# Altium PCB ECEN4730_BRD2_2021-09-29.PcbDoc
Units mil, origin at the board's own origin, x right, y up, seen from the top; angles counter-clockwise.
Board outline 3500 x 2000 mil, 2 copper layers (Top Layer, Bottom Layer), stack 61.756 mil thick; 41 components, 28 nets, 133 pads, 13 vias.
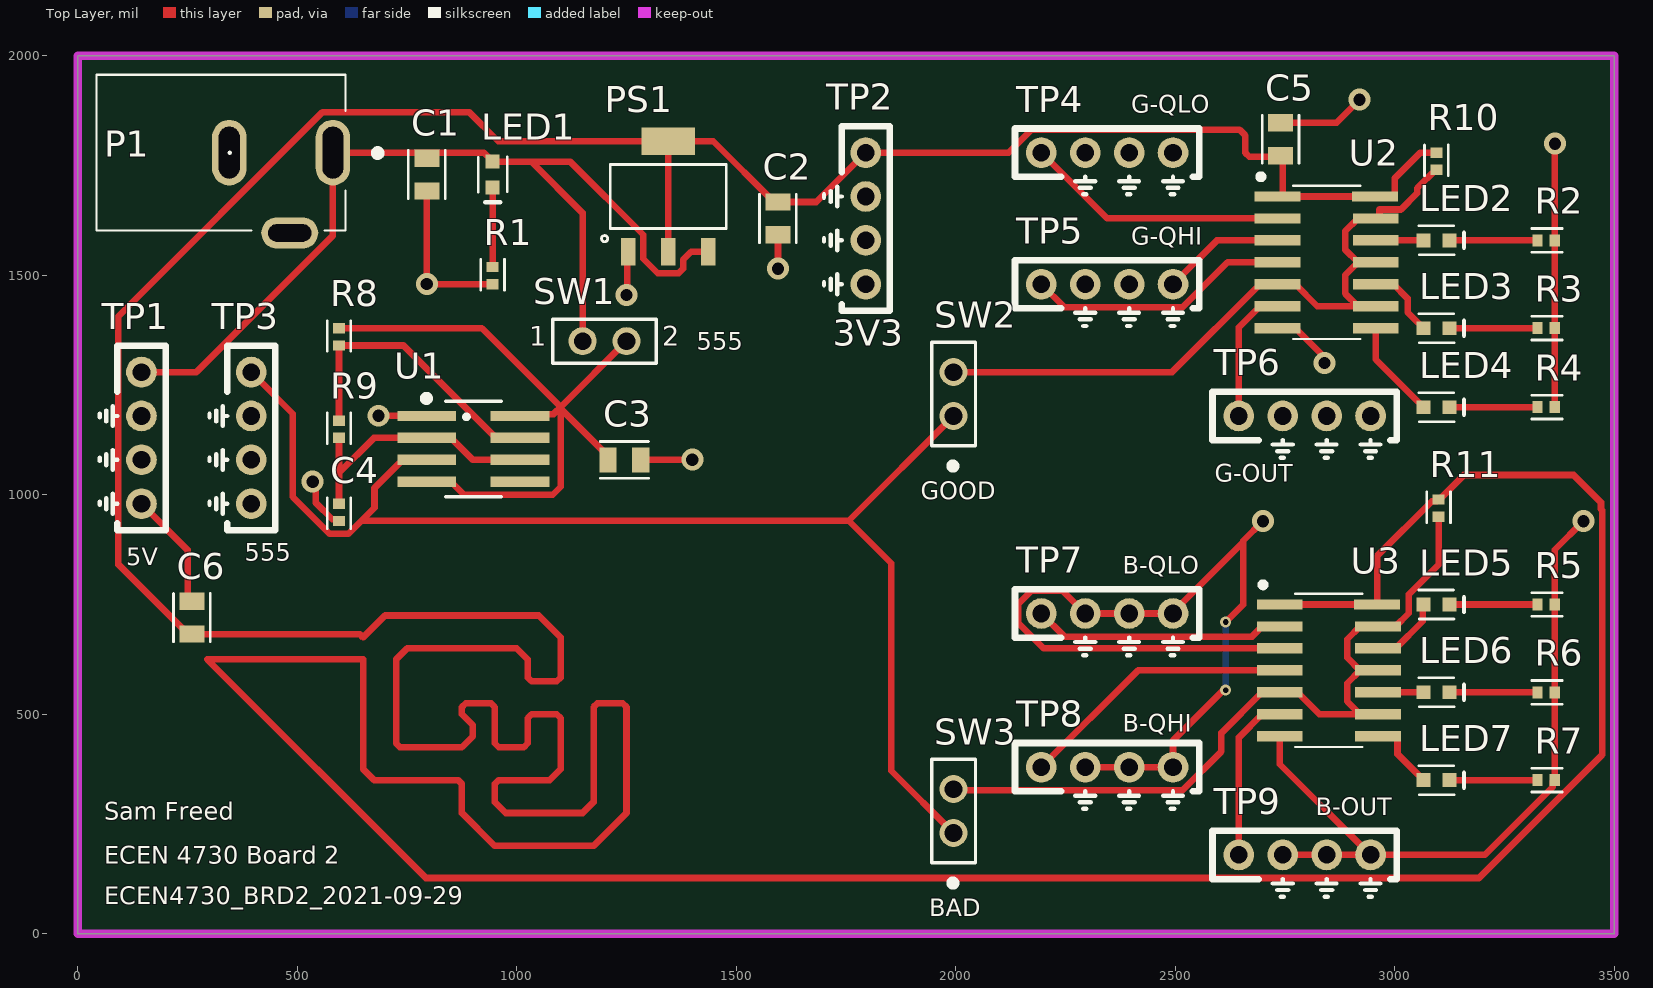
[diagram p0: Top Layer view]
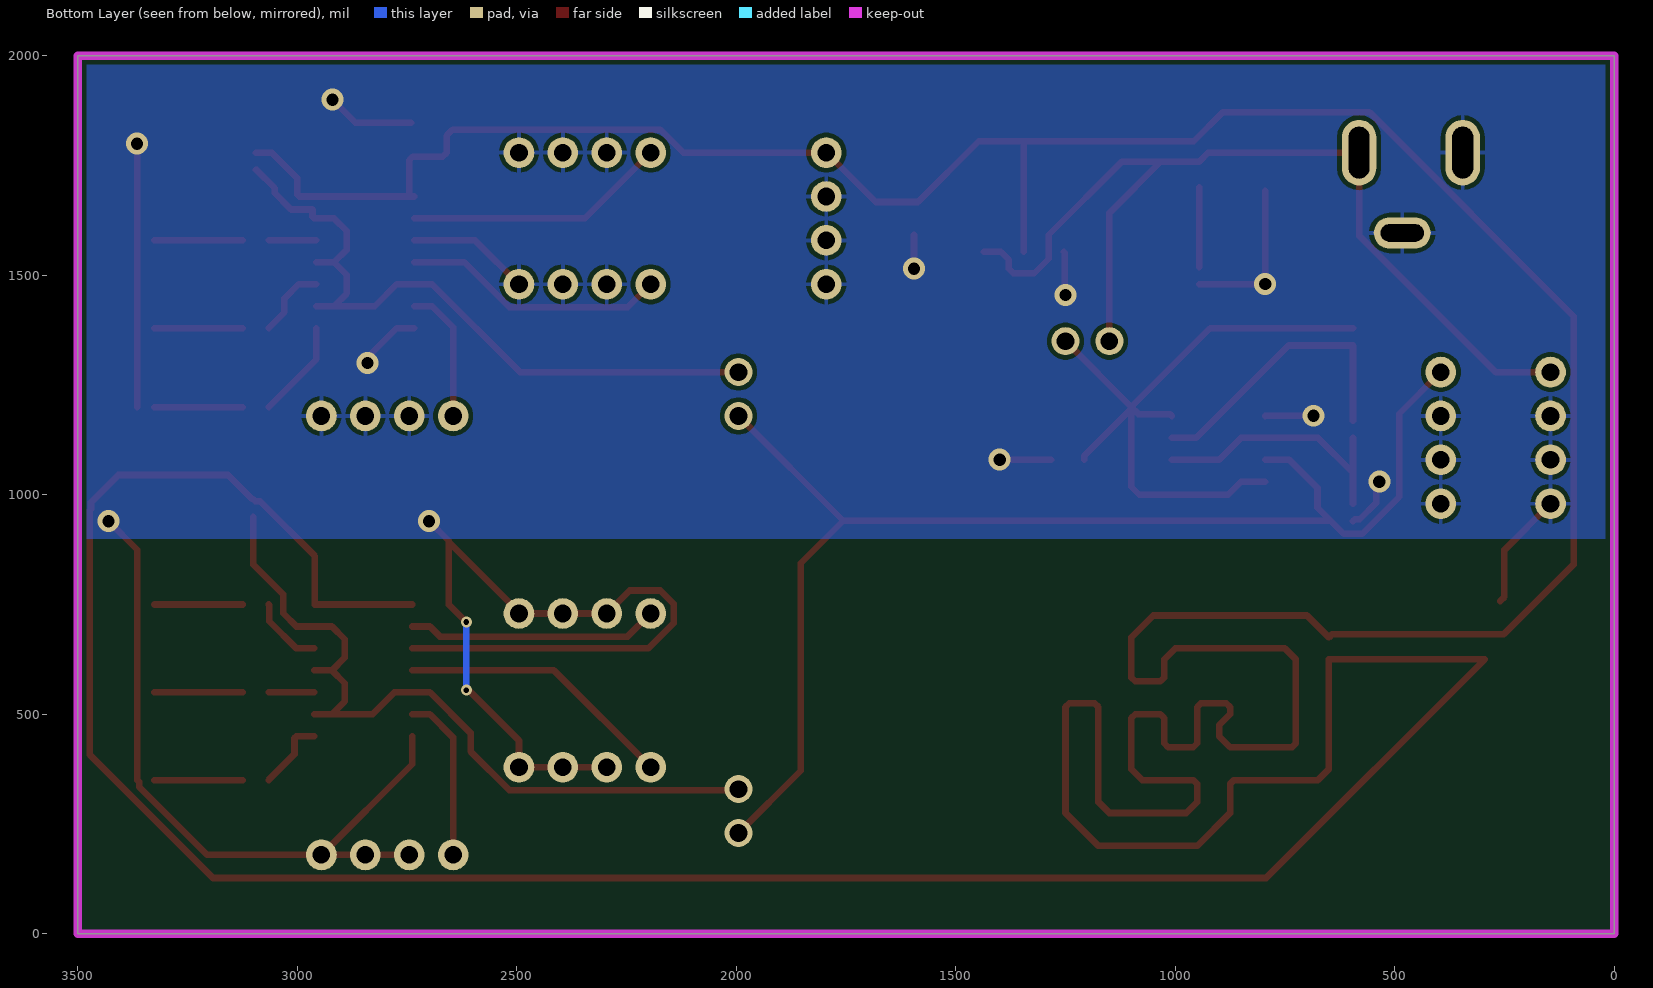
[diagram p1: Bottom Layer view, seen from below]
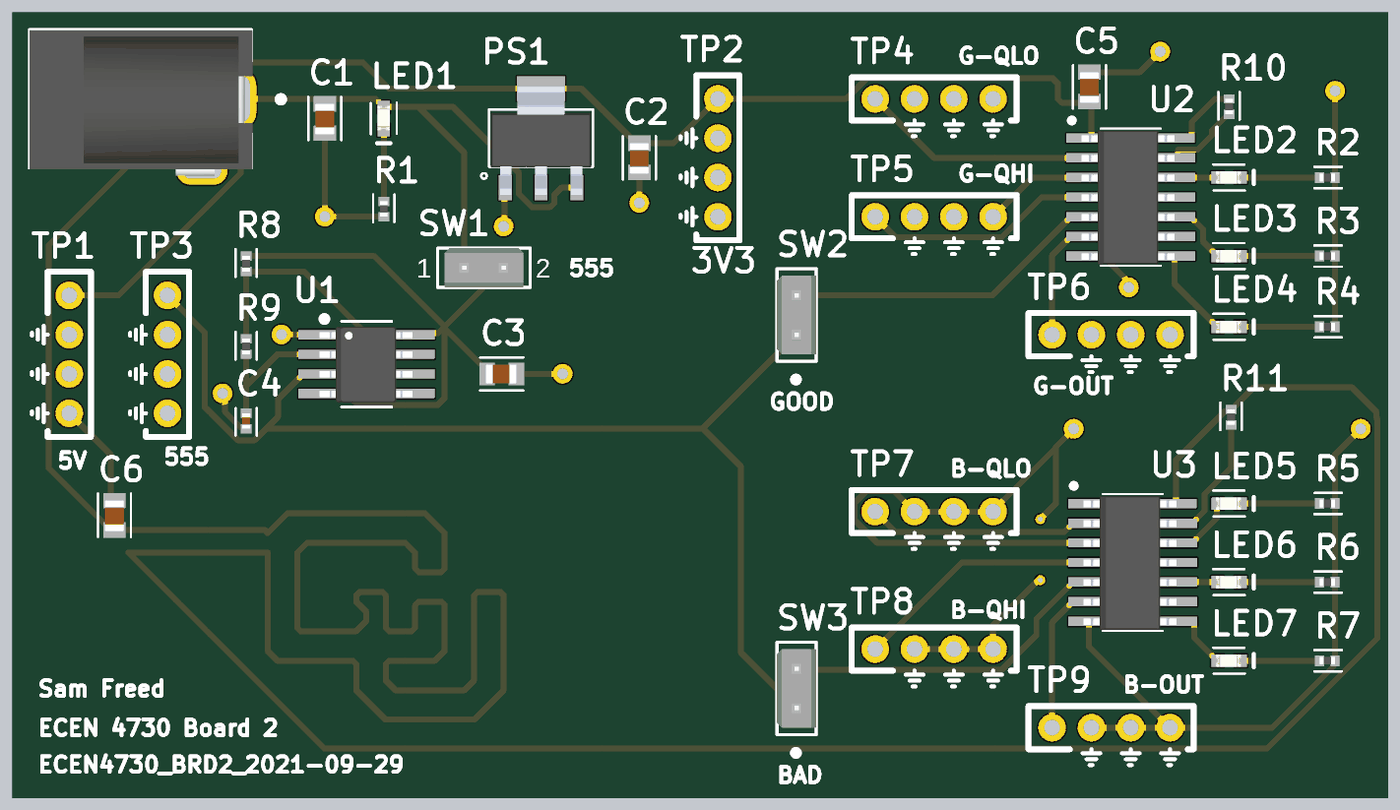
[diagram p2: 3D render of the assembled board from above, using the file's embedded part models]

## Layer stack, top to bottom
Top Solder: solder mask 1, SM-001, Dk 4
Top Layer: signal copper 1.378
Dielectric 1: core 59, Core-043, Dk 4.3
Bottom Layer: signal copper 1.378
Bottom Solder: solder mask 1, SM-001, Dk 4

## Board outline
0,0 3500,0 3500,2000 0,2000

## Design rules (kind name [scope] priority, off if disabled: settings)
BoardOutlineClearance [All] p1: gap=10 ignorepadtopadclearanceinfootprint=FALSE except(0: Arc-SplitContinuation Track-SplitContinuation SMDPad-SplitContinuation THPad-SplitContinuation Via-SplitContinuation Fill-SplitContinuation Poly-SplitContinuation Region-SplitContinuation Text-SplitContinuation)
Clearance [All] p1: gap=10 ignorepadtopadclearanceinfootprint=FALSE except(0: Arc-Hole Track-Hole SMDPad-Hole THPad-Hole Via-Hole Fill-Hole Poly-Hole Region-Hole Text-Hole)
PlaneClearance [All] p1: clearance=10
PlaneConnect [All] p1: planeconnectstyle=Direct reliefexpansion=20 reliefentries=4 reliefconductorwidth=10 reliefairgap=10
PolygonConnect [All] p1: thpad.connectstyle=Relief thpad.reliefconductorwidth=10 thpad.reliefentries=4 thpad.polygonreliefangle="90 Angle" thpad.airgapwidth=10 smdpad.connectstyle=Direct smdpad.reliefconductorwidth=10 smdpad.reliefentries=4 smdpad.polygonreliefangle="90 Angle" smdpad.airgapwidth=10 via.connectstyle=Direct via.reliefconductorwidth=10 via.reliefentries=4 via.polygonreliefangle="90 Angle" via.airgapwidth=10
RoutingVias [All] p1: holewidth=13 width=25 viastyle="Through Hole" minholewidth=13 minwidth=25 maxholewidth=60 maxwidth=80
SolderMaskExpansion [All] p1: expansion=4 istentingtop=FALSE
UnRoutedNet [All] p1: checkbadconnections=TRUE
Width "Schematic Width Constraint_2" [InNet('VCC')] p1: maxlimit=100 minlimit=10 preferedwidth=20 minimp=50.000000 maximp=50.000000 favimp=50.000000
Width "Schematic Width Constraint_1" [InNet('555_5V')] p2: maxlimit=100 minlimit=10 preferedwidth=20 minimp=50.000000 maximp=50.000000 favimp=50.000000
Width "Schematic Width Constraint" [InNet('+5')] p3: maxlimit=100 minlimit=10 preferedwidth=20 minimp=50.000000 maximp=50.000000 favimp=50.000000
Width [All] p4: maxlimit=100 minlimit=6 preferedwidth=6 minimp=50.000000 maximp=50.000000 favimp=50.000000
27 further rules are at their usual default settings.

## Components (designator, comment, footprint, x,y, rotation, side; value= is the part's Value field where it differs from the comment)
C1 "22uF" 0805_Passive_Capaciitor 795,1729.53 r90 top
C2 "22uF" 0805_Passive_Capaciitor 1595,1629.53 r90 top
C3 "22uF" 0805_Passive_Capaciitor 1245,1079.53 r0 top
C4 "1uF" 0402_Passive_Capacitor 595,959.84 r270 top
C5 "22uF" 0805_Passive_Capaciitor 2740,1810 r90 top
C6 "22uF" 0805_Passive_Capaciitor 260,720 r90 top
LED1 "KT-0603R" LED_0603 945,1729.53 r270 top value=Red
LED2 "KT-0603R" LED_0603 3095,1579.53 r0 top value=Red
LED3 "KT-0603R" LED_0603 3095,1379.53 r0 top value=Red
LED4 "KT-0603R" LED_0603 3095,1199.53 r0 top value=Red
LED5 "KT-0603R" LED_0603 3095,750 r0 top value=Red
LED6 "KT-0603R" LED_0603 3095,550 r0 top value=Red
LED7 "KT-0603R" LED_0603 3095,350 r0 top value=Red
P1 "Power Jack" Power_Jack 581.22,1779.53 r180 top value="CONN PWR JACK 2X5.5MM SOLDER"
PS1 "AMS1117-3.3" LDO 1345,1679.53 r0 top value="IC REG LINEAR 3.3V 800MA SOT223"
R1 "1k" 0402_Passive_Resistor 945,1499.21 r90 top value="1K Ohm"
R2 "47 Ohms" 0402_Passive_Resistor 3345,1579.53 r0 top value=47Ohm
R3 "47 Ohms" 0402_Passive_Resistor 3345,1379.53 r0 top value=47Ohm
R4 "47 Ohms" 0402_Passive_Resistor 3345,1199.53 r0 top value=47Ohm
R5 "47 Ohms" 0402_Passive_Resistor 3345,750 r0 top value=47Ohm
R6 "47 Ohms" 0402_Passive_Resistor 3345,550 r0 top value=47Ohm
R7 "47 Ohms" 0402_Passive_Resistor 3345,350 r0 top value=47Ohm
R8 "1k" 0402_Passive_Resistor 595,1359.84 r90 top value="1K Ohm"
R9 "1k" 0402_Passive_Resistor 595,1149.21 r90 top value="1K Ohm"
R10 "10k" 0402_Passive_Resistor 3095,1759.84 r90 top value=10KOhm
R11 "10k" 0402_Passive_Resistor 3100,969.68 r90 top value=10KOhm
SW1 "SW_555OffOn" 2Pin-Header-Conn 1150,1350 r0 top
SW2 "G-Switch" 2Pin-Header-Conn 1995,1179.53 r90 top
SW3 "B-Switch" 2Pin-Header-Conn 1995,229.53 r90 top
TP1 "TP_5V" TP10x_Probe 145,1129.53 r270 top
TP2 "TP 3V3" TP10x_Probe 1795,1629.53 r270 top
TP3 "TP_555_Out" TP10x_Probe 395,1129.53 r270 top
TP4 "G-Lo" TP10x_Probe 2345,1779.53 r0 top
TP5 "G-Hi" TP10x_Probe 2345,1479.53 r0 top
TP6 "G-Out" TP10x_Probe 2795,1179.53 r0 top
TP7 "B-Lo" TP10x_Probe 2345,729.53 r0 top
TP8 "B-Hi" TP10x_Probe 2345,379.53 r0 top
TP9 "B-Out" TP10x_Probe 2795,179.53 r0 top
U1 "NE555DR" TS555IDTTR 901.3,1104.53 r0 top
U2 "74HC14D,653" HEX_74AC14 2845,1529.53 r0 top
U3 "74HC14D,653" HEX_74AC14 2850,600 r0 top

## Footprints (in the part's own frame and the unit in brackets; to place one, negate y for a bottom-side part, rotate by r counter-clockwise, add the part's x,y. Pads: shape width x height; smd on the part's side, far side on the other; paste and mask are expansions set on the pad)
2Pin-Header-Conn [mm]
  round 1.62 hole 1.02: 1(0,0) 2(2.54,0)
  silkscreen extent -1.72,-1.27 4.26,1.26, body extent -1.27,-1.27 3.81,1.27, height 8.13
0402_Passive_Capacitor [mm] "Reference: https://www.worthingtonassembly.com/perfect-0402-footprint"
  rect 0.6x0.7 smd mask+0: 1(-0.5,0) 2(0.5,0)
  silkscreen extent -0.84,-0.69 0.94,0.69, body extent -0.5,-0.27 0.5,0.28, height 0.5
0402_Passive_Resistor [mm] "Reference: https://www.worthingtonassembly.com/perfect-0402-footprint"
  rect 0.6x0.7 smd mask+0: 1(-0.5,0) 2(0.5,0)
  silkscreen extent -0.84,-0.69 0.94,0.69, body extent -0.49,-0.25 0.51,0.25, height 0.4
0805_Passive_Capaciitor [mm] "Reference: http://livepartlibrary.com/fpdimensions.html"
  rect 1x1.45 smd mask+0: 1(-0.95,0) 2(0.95,0)
  silkscreen extent -1.4,-1.07 1.4,1.07, body extent -1.04,-0.62 0.96,0.63, height 1.4
HEX_74AC14 [mm]
  rect 2.65x0.6 smd: 1(-2.836,3.81) 2(-2.836,2.54) 3(-2.836,1.27) 4(-2.836,0) 5(-2.836,-1.27) 6(-2.836,-2.54) 7(-2.836,-3.81) 8(2.836,-3.81) 9(2.836,-2.54) 10(2.836,-1.27) 11(2.836,0) 12(2.836,1.27) 13(2.836,2.54) 14(2.794,3.81)
  silkscreen extent -3.94,-4.43 1.95,5.08, body extent -3.18,-4.35 2.82,4.3, height 1.75
LDO [mil]
  rect 33x63 smd: 1(-91,-126) 2(0,-126) 3(91,-126)
  rect 122x63 smd: 4(0,126)
  silkscreen extent -152,-103 132,73, body extent -128,-144 128,132, height 73
LED_0603 [mm]
  rect 0.8x0.8 smd: 1(-0.75,0) 2(0.75,0)
  silkscreen extent -1.02,-0.84 1.6,0.84, body extent -0.84,-0.41 0.76,0.39, height 0.55
Power_Jack [mm]
  oval 2x3.8 hole 1.2 slot 3 at 90 deg: 1(0,0) 2(6,0)
  oval 3.3x1.8 hole 1 slot 2.5 at 0 deg: 3(2.5,4.65)
  silkscreen extent -2.79,-4.5 13.68,4.5, body extent -0.76,-4.45 13.64,4.95, height 11.49
TP10x_Probe [mil] "Small Probs footprint"
  round 70 hole 40: 1(-150,0) 2(-50,0) 2(50,0) 2(150,0)
  silkscreen extent -210,-95 210,55
TS555IDTTR [mm] "IC OSC Single Timer 2.7MHz 8SOIC"
  rect 3.4x0.6 smd: 1(-2.7,1.905) 2(-2.7,0.635) 3(-2.7,-0.635) 4(-2.7,-1.905) 5(2.7,-1.905) 6(2.7,-0.635) 7(2.7,0.635) 8(2.7,1.905)
  silkscreen extent -2.85,-2.77 1.6,3.05, body extent -3.03,-2.48 2.96,2.43, height 1.75

## Part data
C1 C2 C3 C5 C6: library part C_22uF_0805, "MULTILAYER CERAMIC CAPACITORS MLCC - SMD/SMT 22UF 25V 0805 ROHS", LCSC Part#=C45783, MFR Part #=CL21A226MAQNNNE, Datasheet=https://datasheet.lcsc.com/szlcsc/Samsung-Electro-Mechanics-CL21A226MAQNNNE_C45783.pdf, Type=Basic
C4: library part C_1uF_0402, "MULTILAYER CERAMIC CAPACITORS MLCC - SMD/SMT 1UF 25V 0402 ROHS", LCSC Part#=C52923, MFR Part #=CL05A105KA5NQNC, Datasheet=https://datasheet.lcsc.com/szlcsc/Samsung-Electro-Mechanics-CL05A105KA5NQNC_C52923.pdf, Type=Basic
LED1 LED2 LED3 LED4 LED5 LED6 LED7: library part LED_RED_0603, "LIGHT EMITTING DIODES (LED) RED 520~625NM 90~100MCD@20MA TOP VIEW 0603 ROHS", LCSC Part#=C2286, Datasheet=https://datasheet.lcsc.com/szlcsc/Everlight-Elec-19-217-BHC-ZL1M2RY-3T_C72041.pdf, MFR Part #=KT-0603R, Type=Basic
P1: library part "P_Power Jack", "Power Barrel Connector Jack 2.10mm ID (0.083\"), 5.50mm OD (0.217\") Through Hole, Right Angle", LCSC Part#=C136744, Digikey Link=https://www.digikey.com/product-detail/en/PJ-102A/CP-102A-ND/275425/?itemSeq=304982367, Digikey Part=CP-102A-ND, Type=Extended
PS1: library part PS_AMS_LDO_3v3, "LOW DROPOUT REGULATORS(LDO) POSITIVE FIXED 1.3V @ 800MA 15V 3.3V 1A SOT-223 ROHS", LCSC Part#=C6186, MFR Part #=AMS1117-3.3, Type=Basic
R1 R8 R9: library part R_1K_0402, "1 kOhms chip resistor SURFACE MOUNT 1KOHMS ±1% 1/16W 0402 ROHS", LCSC Part#=C11702, MFR Part #=0402WGF1001TCE, Datasheet=https://datasheet.lcsc.com/szlcsc/Uniroyal-Elec-0402WGF1001TCE_C11702.pdf, Type=Basic
R2 R3 R4 R5 R6 R7: library part R_47Ohm_0402, "CHIP RESISTOR - SURFACE MOUNT 47OHMS ±1% 1/16W 0402 ROHS", LCSC Part#=C25118, MFR Part #=0402WGF470JTCE, Datasheet=https://datasheet.lcsc.com/szlcsc/Uniroyal-Elec-0402WGF470JTCE_C25118.pdf, Type=Basic
R10 R11: library part R_10KOhm_0402, "CHIP RESISTOR - SURFACE MOUNT 10KOHMS ±1% 1/16W 0402 ROHS", LCSC Part#=C25744, MFR Part #=0402WGF1002TCE, Datasheet=https://datasheet.lcsc.com/szlcsc/Uniroyal-Elec-0402WGF1002TCE_C25744.pdf, Type=Basic
SW1 SW2 SW3: library part SW_2Pin_100mil_Switch, "2Pin Header", LCSC Part#=C124375, Type=Extended
TP1 TP2 TP3 TP4 TP5 TP6 TP7 TP8 TP9: library part TP_10x_Probe, "Test Point 300 mil centers"
U1: library part U_555_Slow, "555 Timer SOIC-8_150MIL ROHS 150ns Rise Time", LCSC Part#=C7593, Digikey Link=https://www.digikey.com/product-detail/en/texas-instruments/NE555DR/296-6501-1-ND/372490, MFR Part #=NE555DR, Type=Basic
U2 U3: library part U_7414_HC_Hex, "Inverter IC 6 Channel Schmitt Trigger 14-SOIC", LCSC Part#=C5605, Datasheet=https://datasheet.lcsc.com/szlcsc/ON-Semicon-ON-74AC14SCX_C5482.pdf, MFR Part #=74HC14D,653, Type=Basic

## Via types
v1: diameter 50, hole 28, Top Layer to Bottom Layer, 11 vias
v2: diameter 25, hole 13, Top Layer to Bottom Layer, 2 vias

## Nets (pads, with @x,y where several pads share a name; then routed paths per layer and width w, separated by ;. In a path a pad name is that pad's centre, name@x,y a point inside that pad or via, vN(x,y) a via of type N, cw(c..) or ccw(c..) an arc to the next point about the centre after c; other vN are vias at no path point)
555_5V: C3.1 R8.2 SW1.2 U1.4 U1.8 | length 1554.6
  Top Layer w15: R8.2 920.47,1379.53 1100,1200 ; U1.4 850.12,1029.53 879.43,1000.22 1081.78,1000.22 1100,1018.44 1100,1191.92 ; U1.8 1011.91,1183.84 1083.84,1183.84 1091.92,1191.92 1100,1191.92 ; C3.1 1207.6,1088.39 1104.06,1191.92 1100,1191.92 ; SW1.2 1100,1200 ; 1100,1191.92 1100,1200
555_Out: SW2.1 SW3.1 TP3.1 U1.3 | length 3018.1
  Top Layer w15: TP3.1 489.75,1184.78 489.75,995.07 573.97,910.85 616.03,910.85 645.91,940.73 ; U1.3 739.88,1079.53 675.8,1015.45 675.8,970.62 645.91,940.73 ; SW3.1 1853.1,371.42 1853.1,843.84 1756.2,940.73 ; SW2.1 1756.2,940.73 ; 645.91,940.73 1756.2,940.73
+5: C1.2 LED1.1 P1.1 PS1.3 SW1.1 TP1.1 | length 2244.6
  Top Layer w15: TP1.1 270.25,1279.53 581.22,1590.5 P1.1 924.53,1779.53 LED1.1 1033.11,1759.05 ; SW1.1 1150,1642.17 1033.11,1759.05 ; PS1.3 1397,1553.53 1379,1535.53 1379,1514.78 1368.75,1504.53 1321.25,1504.53 1288,1537.78 1288,1592.28 1121.22,1759.05 1033.11,1759.05
GND: C1.1 C2.1 C3.2 C4.2 C5.2 C6.2 P1.2 P1.3 PS1.1 R1.1 R2.2 R3.2 R4.2 R5.2 R6.2 R7.2 TP1.2 TP2.2 TP3.2 TP4.2 TP5.2 TP6.2 TP7.2 TP8.2 TP9.2 U1.1 U2.3 U2.7 U3.3 U3.7 | length 6185.6
  Top Layer w15: TP1.2@145,979.53 250,874.53 250,767.4 C6.2 ; v1(535,1030) 541.69,1023.31 541.69,982.5 579.72,944.47 590.69,944.47 C4.2 ; v1(685,1180) 685.24,1179.76 794.76,1179.76 U1.1 ; C1.1 v1(795,1480) 795.24,1479.76 944.76,1479.76 R1.1 ; v1(1250,1455) 1252,1457 1252,1551.53 PS1.1 ; C3.2 1282.87,1080 v1(1400,1080) ; v1(1595,1515) C2.1 ; TP8.2@2295,379.53 2395,379.53 2495,379.53 2495,440 2610,555 v2(2615,555) ; TP5.2@2495,1479.53 2595,1579.53 U2.3 ; v2(2615,710) 2655.11,750.11 2655.11,892.37 ; v1(2700,940) 2655.11,895.11 2655.11,892.37 ; U2.7 2773.7,1379.53 2833.3,1319.93 2833.3,1306.7 v1(2840,1300) ; U3.7 2738.35,386.18 TP9.2@2945,179.53 ; U3.3 2200.28,650 2142.5,707.78 2142.5,751.27 2173.25,782.03 2242.5,782.03 2295,729.53 2395,729.53 2495,729.53 2495,732.26 2655.11,892.37 ; C5.2 2867.4,1847.4 v1(2920,1900) ; TP9.2@2745,179.53 2845,179.53 TP9.2@2945,179.53 ; R4.2 R3.2 R2.2 3364.84,1579.68 3364.84,1799.84 v1(3365,1800) ; v1(3430,940) 3364.69,874.69 R5.2 R6.2 R7.2 3360.37,345.69 3360.37,334.72 3205.18,179.53 TP9.2@2945,179.53
  Bottom Layer w15: v2(2615,555) v2(2615,710)
NetC4_1: C4.1 R9.1 U1.2 U1.6 | length 616.3
  Top Layer w15: C4.1 595,1050 ; R9.1 595,1050 ; U1.6 900.12,1079.53 850.12,1129.53 U1.2 674.53,1129.53 595,1050
NetLED1_2: LED1.2 R1.2 | length 181.1
  Top Layer w15: R1.2 LED1.2
NetLED2_1: LED2.1 U2.12 | length 108.8
  Top Layer w15: U2.12 LED2.1
NetLED2_2: LED2.2 R2.1 | length 200.8
  Top Layer w15: LED2.2 R2.1
NetLED3_1: LED3.1 U2.10 | length 168.7
  Top Layer w15: U2.10 2997.01,1479.53 3029.27,1447.26 3029.27,1415.73 LED3.1
NetLED3_2: LED3.2 R3.1 | length 200.8
  Top Layer w15: LED3.2 R3.1
NetLED4_1: LED4.1 U2.8 | length 225.1
  Top Layer w15: U2.8 2956.65,1308.35 LED4.1
NetLED4_2: LED4.2 R4.1 | length 200.8
  Top Layer w15: LED4.2 R4.1
NetLED5_1: LED5.1 U3.12 | length 166.6
  Top Layer w15: U3.12 3002.01,650 3063.76,711.75 3063.76,748.29 LED5.1
NetLED5_2: LED5.2 R5.1 | length 200.8
  Top Layer w15: LED5.2 R5.1
NetLED6_1: LED6.1 U3.10 | length 103.8
  Top Layer w15: U3.10 LED6.1
NetLED6_2: LED6.2 R6.1 | length 200.8
  Top Layer w15: LED6.2 R6.1
NetLED7_1: LED7.1 U3.8 | length 166.6
  Top Layer w15: U3.8 3002.01,450 3006.32,445.69 3006.32,409.15 LED7.1
NetLED7_2: LED7.2 R7.1 | length 200.8
  Top Layer w15: LED7.2 R7.1
NetR8_1: R8.1 R9.2 U1.7 | length 671.1
  Top Layer w15: R9.2 R8.1 741.85,1340.16 952.48,1129.53 U1.7
NetTP4_1: TP4.1 U2.2 | length 600.5
  Top Layer w15: TP4.1 2345,1629.53 U2.2
NetTP5_1: TP5.1 U2.4 | length 602.5
  Top Layer w15: TP5.1 2247.5,1427.03 2516.75,1427.03 2619.25,1529.53 U2.4
NetTP6_1: TP6.1 U2.6 | length 310.2
  Top Layer w15: TP6.1 2645,1381.54 2692.99,1429.53 U2.6
NetTP7_1: TP7.1 U3.2 | length 574.6
  Top Layer w15: TP7.1 2247.5,677.03 2675.02,677.03 2697.99,700 U3.2
NetTP8_1: TP8.1 U3.4 | length 634.7
  Top Layer w15: TP8.1 2415.47,600 U3.4
NetTP9_1: TP9.1 U3.6 | length 382.8
  Top Layer w15: TP9.1 2645,447.01 2697.99,500 U3.6
SW_B: R11.1 SW3.2 U3.5 U3.9 U3.11 U3.13 | length 1765.4
  Top Layer w15: SW3.2 1997.5,327.03 2516.75,327.03 2605.21,415.49 2605.21,457.22 2697.99,550 U3.5 2778.7,550 2828.7,500 U3.9@2921.3,500 ; U3.9 U3.9@2921.3,500 ; U3.11 U3.11@2921.3,600 ; R11.1 3100,840.77 3032.22,773 3032.22,730.22 3002.01,700 U3.13 2921.3,700 2891.99,670.69 2891.99,629.31 U3.11@2921.3,600 ; U3.9@2921.3,500 2891.99,529.31 2891.99,570.69 U3.11@2921.3,600
SW_G: R10.1 SW2.2 U2.5 U2.9 U2.11 U2.13 | length 1594.8
  Top Layer w15: SW2.2 2492.99,1279.53 2692.99,1479.53 U2.5 2773.7,1479.53 2823.7,1429.53 U2.9@2916.3,1429.53 ; U2.9 U2.9@2916.3,1429.53 ; U2.11 U2.11@2916.3,1529.53 ; R10.1 3093.03,1740.16 3051.46,1698.59 3051.46,1687.26 3014.2,1650 2965.44,1650 2965.44,1633.84 2961.13,1629.53 U2.13 2916.3,1629.53 2886.99,1600.22 2886.99,1558.84 U2.11@2916.3,1529.53 ; U2.9@2916.3,1429.53 2886.99,1458.84 2886.99,1500.22 U2.11@2916.3,1529.53
VCC: C2.2 C5.1 C6.1 PS1.2 PS1.4 R10.2 R11.2 TP2.1 U2.1 U2.14 U3.1 U3.14 | length 14348.4
  Top Layer w15: PS1.2 PS1.4 ; U2.1 U2.1@2740.69,1679.53 ; U3.1 U3.14 2960,860.34 3084.72,985.06 3095.69,985.06 R11.2 3101.97,989.37 3157.7,1045.1 3407.5,1045.1 3470,982.6 3470,967.55 3472.5,965.05 3472.5,407.48 3192.05,127.03 792.97,127.03 295,625 650,625 650,375 675,350 866.21,350 875,341.21 875,275 950,200 1175,200 1250,275 1250,516.21 1241.21,525 1183.79,525 1175,516.21 1175,300 1150,275 975,275 950,300 950,341.21 958.79,350 1075,350 1100,375 1100,491.21 1091.21,500 1033.79,500 1025,491.21 1025,433.79 1016.21,425 958.79,425 950,433.79 950,516.21 941.21,525 883.79,525 875,516.21 875,500 900,475 900,450 875,425 733.79,425 725,433.79 725,625 750,650 1000,650 1025,625 1025,583.79 1033.79,575 1091.21,575 1100,583.79 1100,675 1050,725 700,725 650,675 642.4,682.6 C6.1 251.14,682.6 92.5,841.24 92.5,1406.67 557.66,1871.83 891.43,1871.83 957.73,1805.53 PS1.4 ; R10.2 3058.72,1779.53 2999.67,1720.47 2999.67,1683.84 2995.35,1679.53 U2.14 U2.1@2740.69,1679.53 ; PS1.4 1447.54,1805.53 1586.14,1666.93 C2.2 1682.4,1666.93 TP2.1 2120.75,1779.53 2173.25,1832.03 2646.24,1832.03 2660,1818.27 2660,1778.79 2668.79,1770 2737.4,1770 2745,1762.4 2745,1683.84 U2.1@2740.69,1679.53
pads on no net: U1.5

## Polygon pours and split planes (outlines as drawn)
GND on Bottom Layer "GND_L02_P001" (solid, pour order 1): 0,900 3500,900 3500,2000 0,2000

## Keep-outs
Keep-Out Layer:
  the board outline again, w20

## Silkscreen, mask and mechanical layers (free items; w line width, h text height)
Top Overlay:
  text "G-QLO" at 2400,1870 h40
  text "G-QHI" at 2400,1570 h40
  text "3V3" at 1720,1340 h60
  text "555" at 1410,1330 h40
  text "G-OUT" at 2590,1030 h40
  text "GOOD" at 1920,990 h40
  text "555" at 380,850 h40
  text "5V" at 110,840 h40
  text "B-QLO" at 2380,820 h40
  text "B-QHI" at 2380,460 h40
  text "B-OUT" at 2820,270 h40
  text "Sam Freed" at 60,260 h40
  text "ECEN 4730 Board 2" at 60,160 h40
  text "ECEN4730_BRD2_2021-09-29" at 60,66.66 h40
  text "BAD" at 1940,40 h40

## Text inside footprints (layer, text, board x,y; h text height)
SW1: Top Overlay "1" at 1028.35,1325 h77.5; Top Overlay "2" at 1331.14,1325 h77.5; Mechanical 16 "1" at 1028.35,1325 h77.5; Mechanical 16 "2" at 1331.14,1325 h77.5